# Altium PCB MB1364.PcbDoc
Units mm, origin at the board's own origin, x right, y up, seen from the top; angles counter-clockwise.
Board outline 70 x 133.34 mm, 6 copper layers (Top Layer, Signal Layer 1, Signal Layer 2, Signal Layer 3, Signal Layer 4, Bottom Layer), stack 1.57 mm thick; 29 components, 132 nets, 264 pads, 8 vias.
Unrouted connection lines stored in the file: 63.
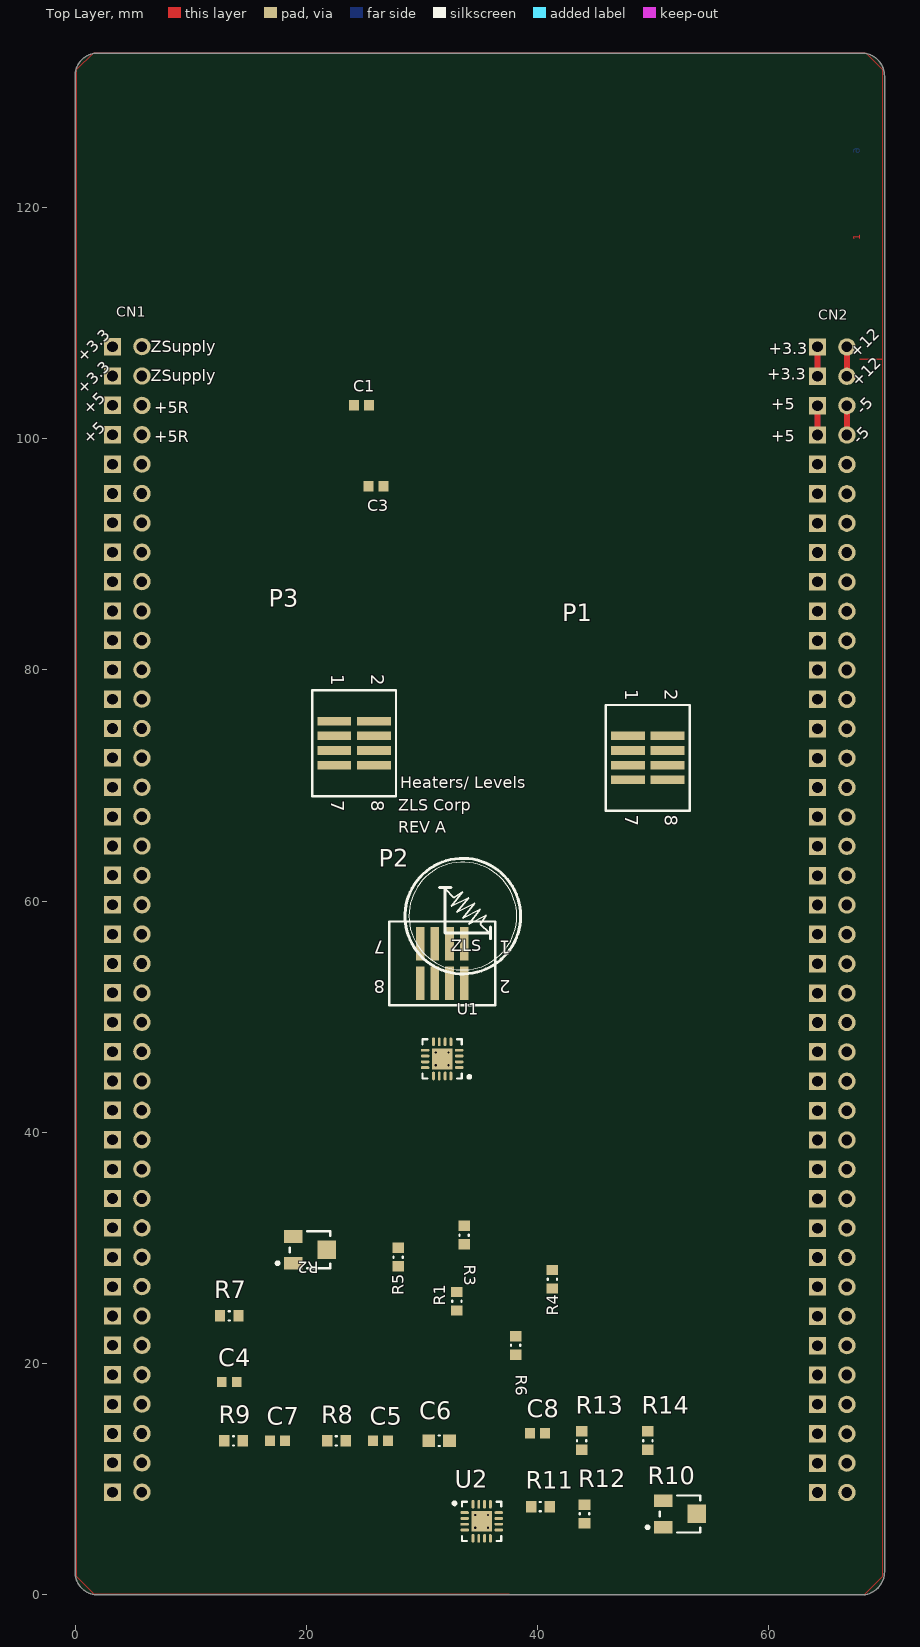
[diagram p0: Top Layer view]
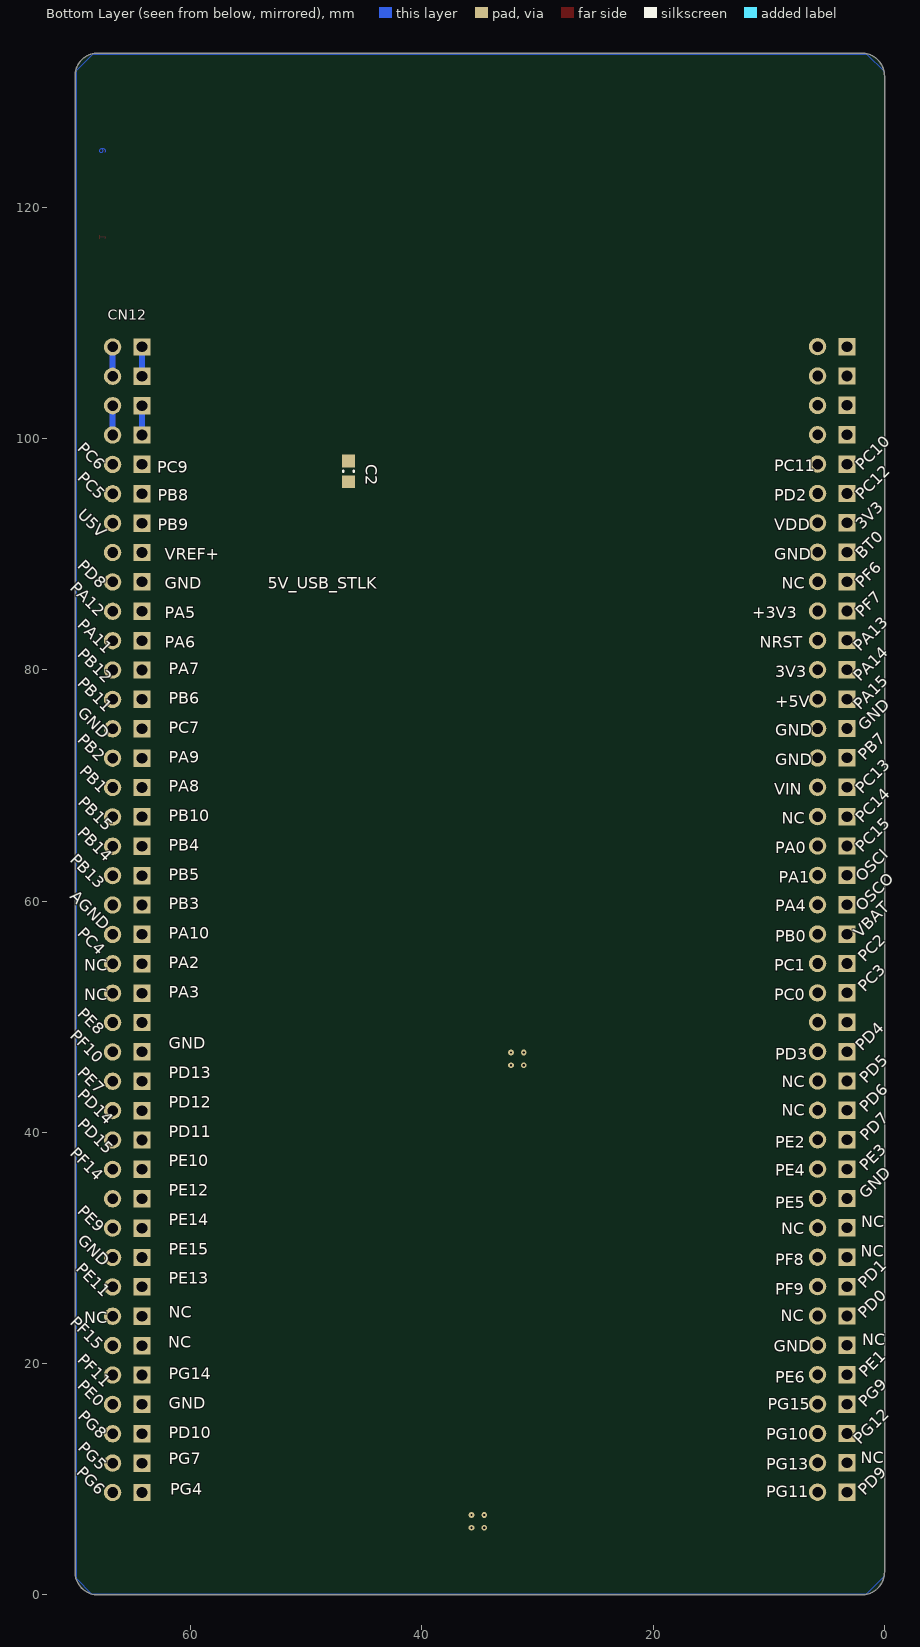
[diagram p1: Bottom Layer view, seen from below]
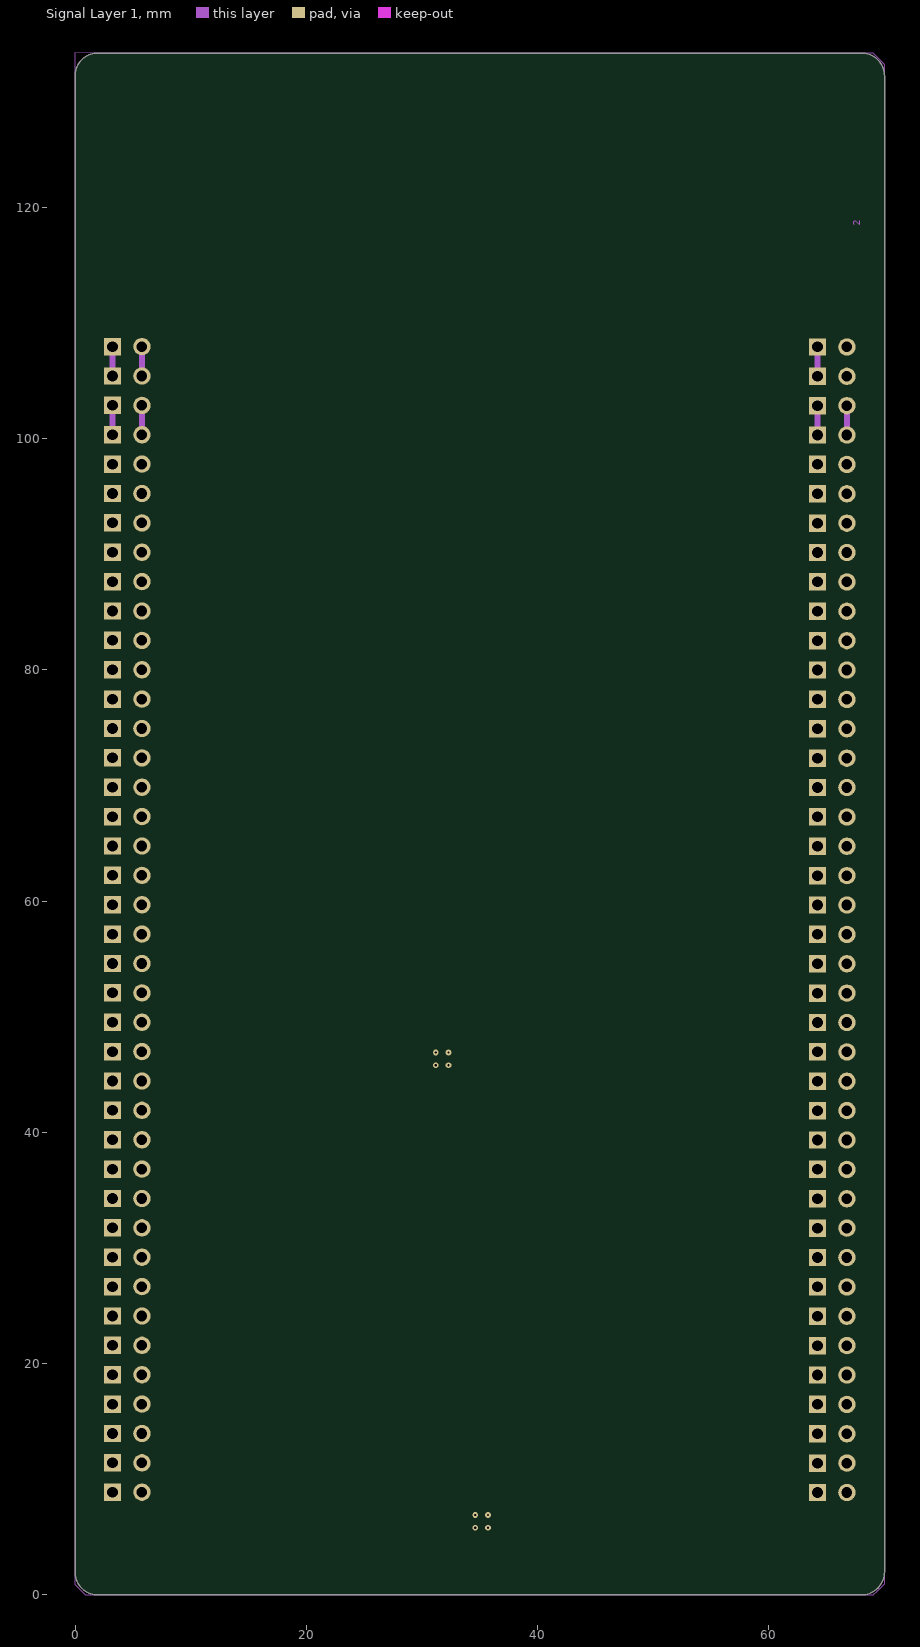
[diagram p2: Signal Layer 1]
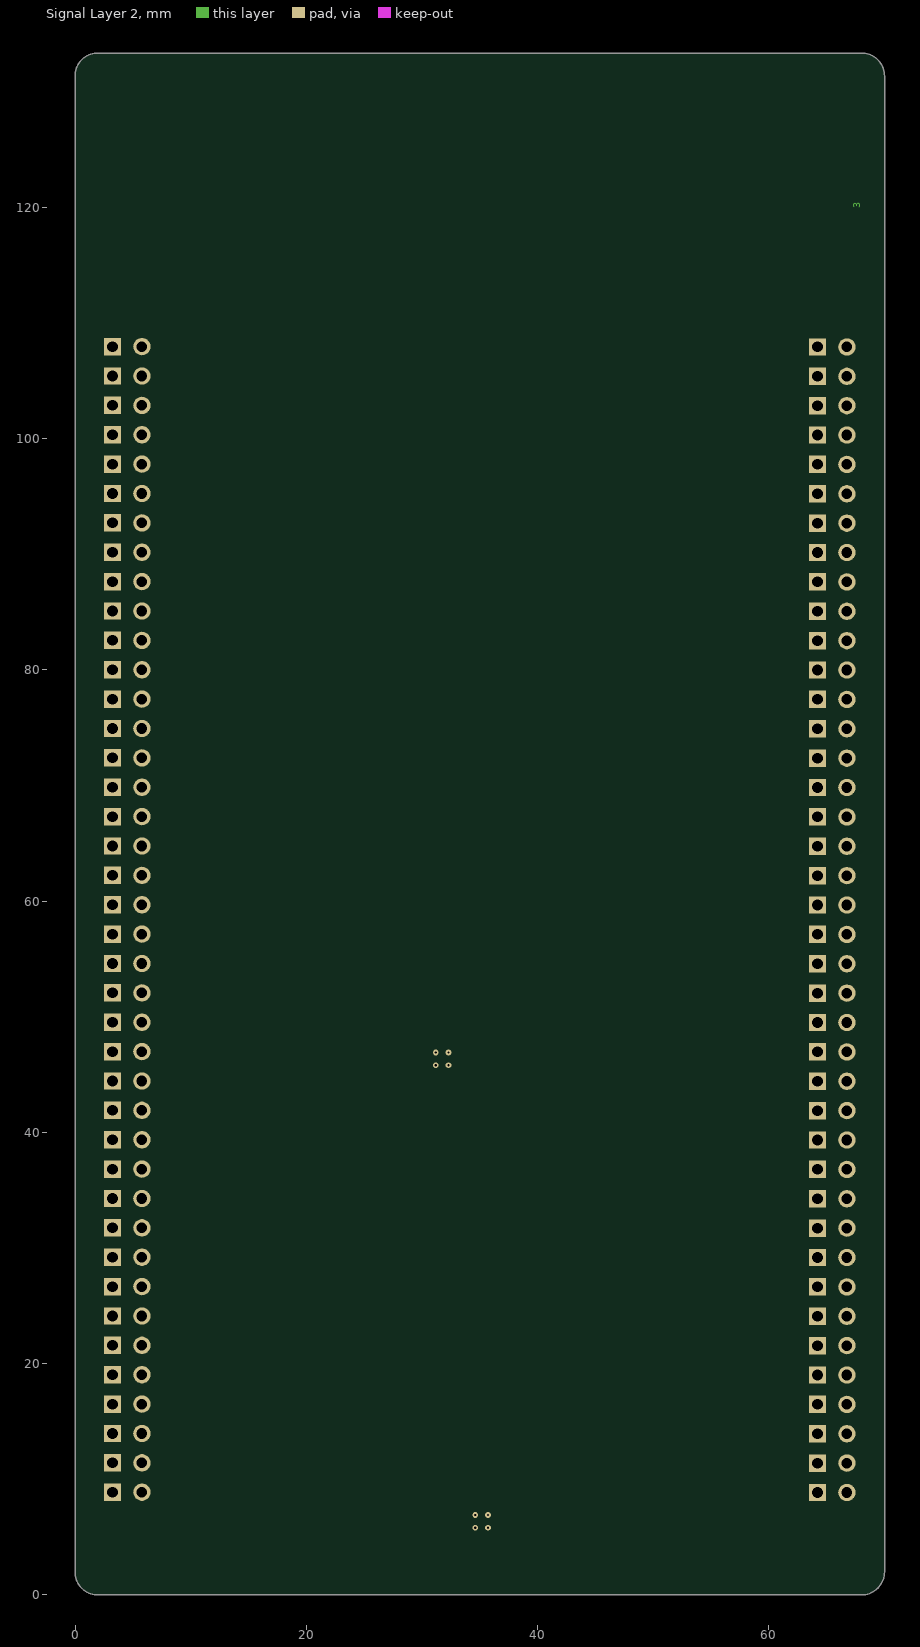
[diagram p3: Signal Layer 2]
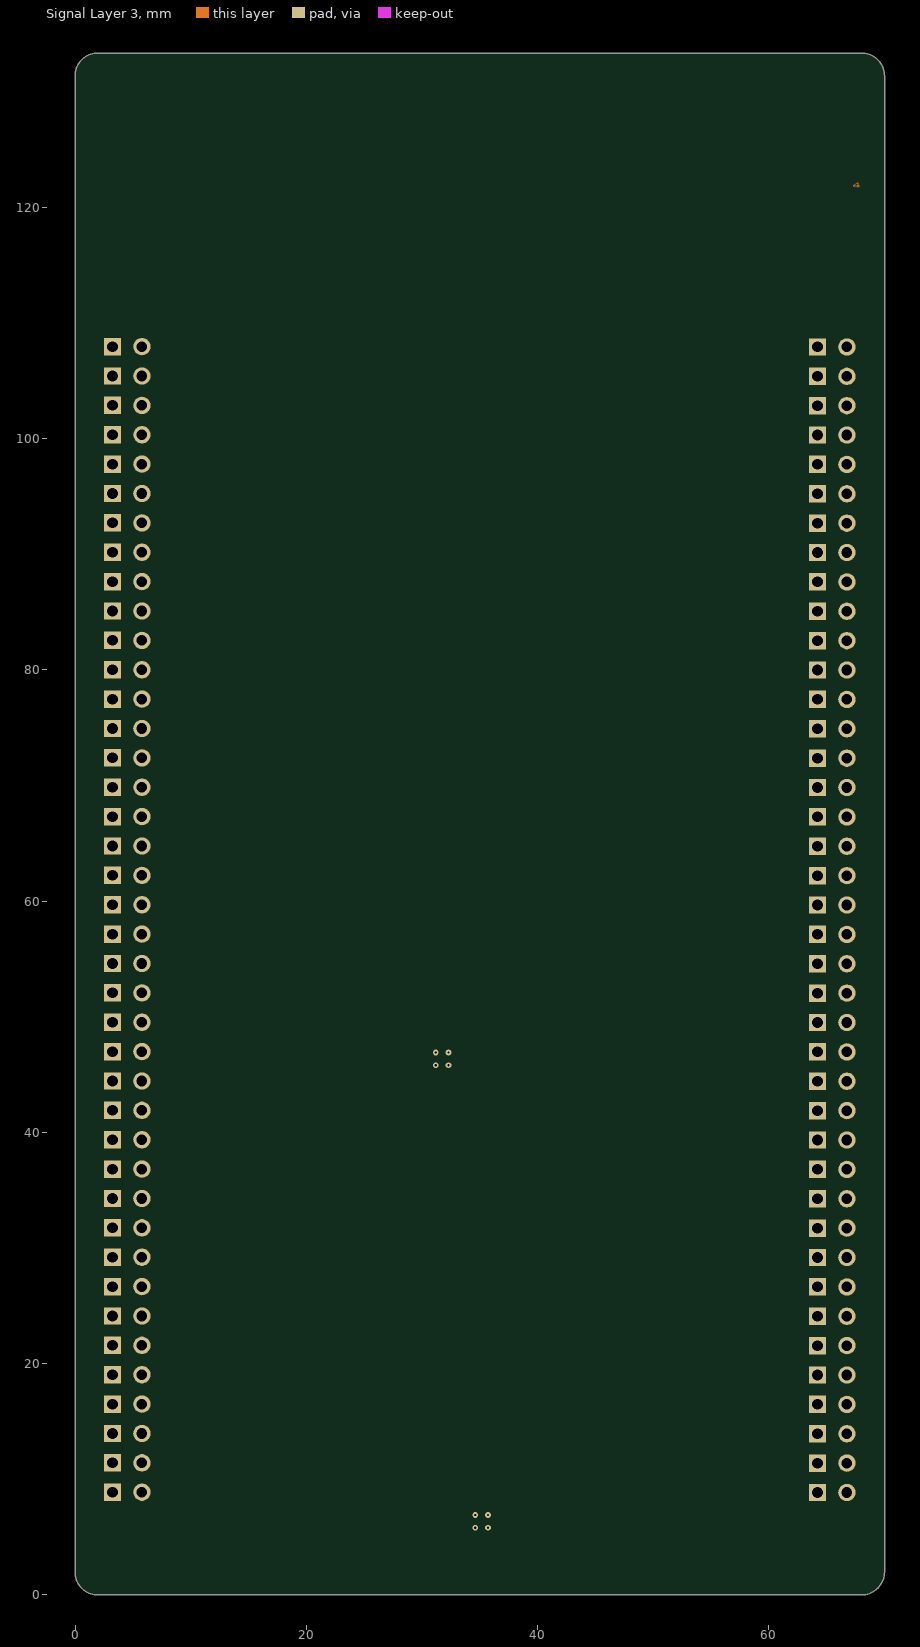
[diagram p4: Signal Layer 3]
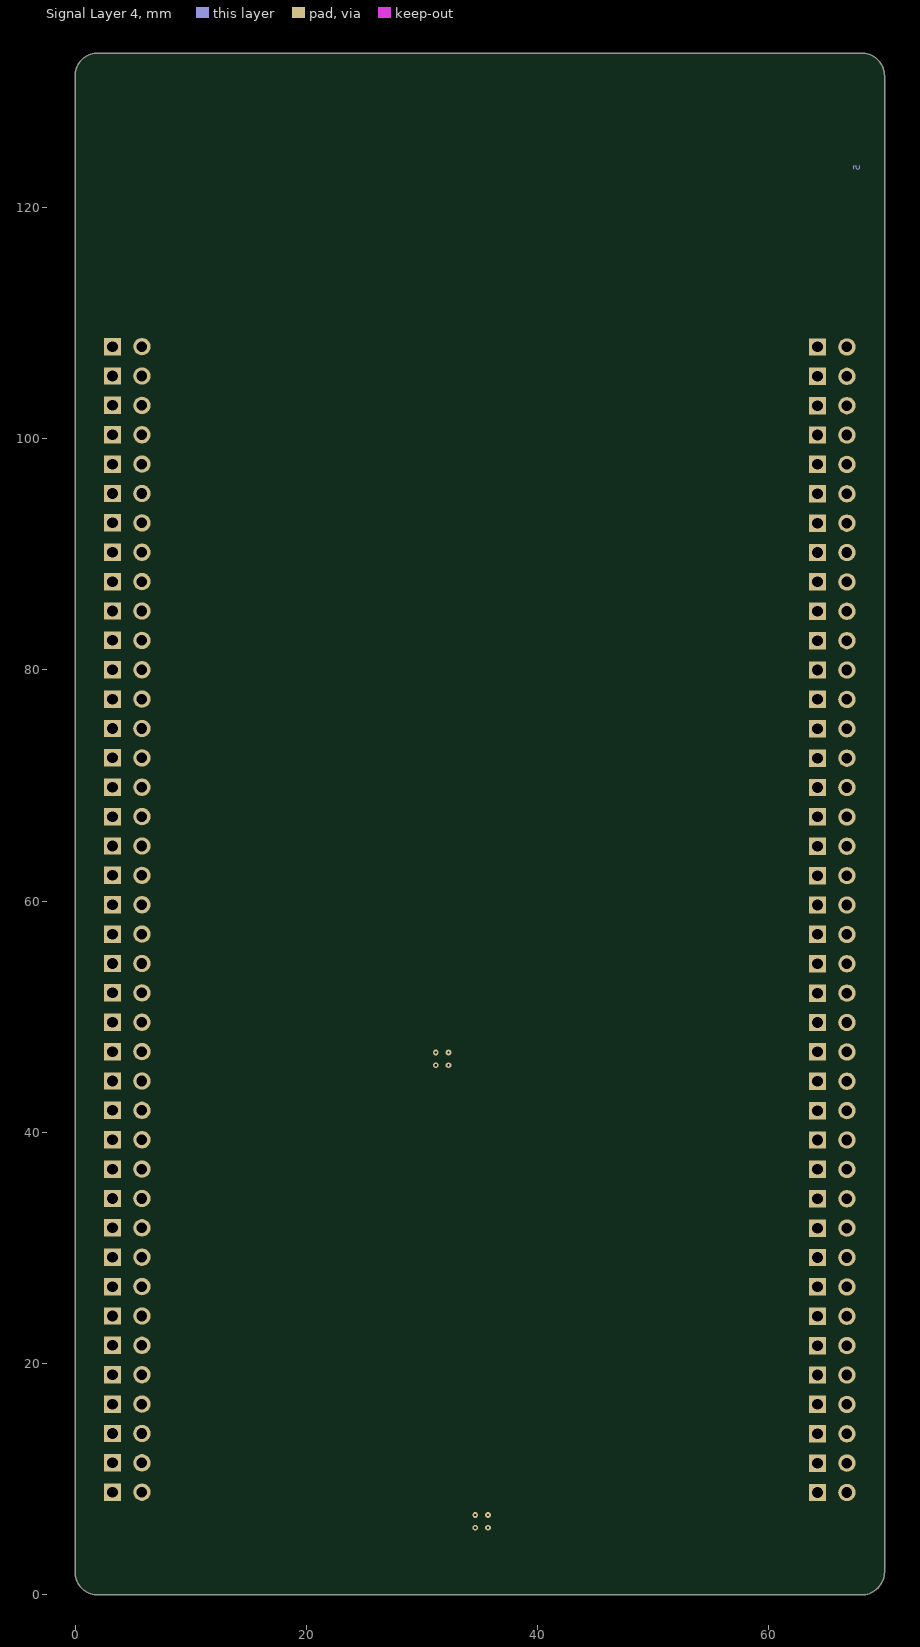
[diagram p5: Signal Layer 4]

## Layer stack, top to bottom
Top Solder: solder mask 0.015, Solder Resist, Dk 3.5
Top Layer: signal copper 0.042
Dielectric 1: prepreg 0.0991, FR-4, Dk 4.2
Signal Layer 1: signal copper 0.0348
Dielectric 2: core 0.1016, Dk 4.2
Signal Layer 2: signal copper 0.0348
Dielectric 3: prepreg 0.9457, Dk 4.2
Signal Layer 3: signal copper 0.0348
Dielectric 4: core 0.1016, Dk 4.2
Signal Layer 4: signal copper 0.0348
Dielectric 5: prepreg 0.0991, Dk 4.2
Bottom Layer: signal copper 0.042
Bottom Solder: solder mask 0.015, Solder Resist, Dk 3.5

## Board outline
0,2 ccw(c2,2) 2,0 37.369,0 51.369,0 68,0 ccw(c68,2) 70,2 70,131.34 ccw(c68,131.34) 68,133.34 2,133.34 ccw(c2,131.34) 0,131.34

## Design rules (kind name [scope] priority, off if disabled: settings)
BoardOutlineClearance [All] p1: gap=0.4 ignorepadtopadclearanceinfootprint=FALSE
Clearance Clearance_RMII_SINGLE_50R [InNetClass('NC_RMII_SINGLE_50R')] p1: gap=0.12 ignorepadtopadclearanceinfootprint=TRUE except(0.2: Arc-Hole Track-Hole SMDPad-SMDPad SMDPad-THPad SMDPad-Hole THPad-THPad THPad-Hole Via-Via Via-Hole Fill-Hole Poly-Hole Region-Hole Text-Hole; 0.3: Arc-Fill Arc-Poly Track-Track Track-Fill Track-Poly SMDPad-Fill SMDPad-Poly THPad-Fill THPad-Poly Via-Fill Via-Poly Fill-Fill Fill-Poly Poly-Poly)
Clearance Clearance_VCP_ISO300 [InNetClass('NC_VCP_ISO300')] p2: gap=0.12 ignorepadtopadclearanceinfootprint=TRUE except(0.2: Arc-Hole Track-Hole SMDPad-SMDPad SMDPad-THPad SMDPad-Hole THPad-THPad THPad-Hole Via-Via Via-Hole Fill-Hole Poly-Hole Region-Hole Text-Hole; 0.3: Arc-Fill Arc-Poly Track-Track Track-Fill Track-Poly SMDPad-Fill SMDPad-Poly THPad-Fill THPad-Poly Via-Fill Via-Poly Fill-Fill Fill-Poly Poly-Poly)
Clearance Clearance_USB_DIFF_90R [InNetClass('NC_USB_DIFF_90R')] p3: gap=0.12 ignorepadtopadclearanceinfootprint=TRUE except(0.2: Arc-Hole Track-Hole SMDPad-SMDPad SMDPad-THPad SMDPad-Hole THPad-THPad THPad-Hole Via-Via Via-Hole Fill-Hole Poly-Hole Region-Hole Text-Hole; 0.3: Arc-Fill Arc-Poly Track-Fill Track-Poly SMDPad-Fill SMDPad-Poly THPad-Fill THPad-Poly Via-Fill Via-Poly Fill-Fill Fill-Poly Poly-Poly)
Clearance Clearance_USB_DIFF_90R_OPTION [InNetClass('NC_USB_DIFF_90R_OPTION') vs OnLayer('Top Layer')] p4: gap=0.12 ignorepadtopadclearanceinfootprint=TRUE except(0.2: Arc-Hole Track-Hole SMDPad-SMDPad SMDPad-THPad SMDPad-Hole THPad-THPad THPad-Hole Via-Via Via-Hole Fill-Hole Poly-Hole Region-Hole Text-Hole; 0.226: Track-Track; 0.3: Arc-Fill Arc-Poly Track-Fill Track-Poly SMDPad-Fill SMDPad-Poly THPad-Fill THPad-Poly Via-Fill Via-Poly Fill-Fill Fill-Poly Poly-Poly)
Clearance Clearance_USB_DIFF_90R_OPTION_L3 [InNetClass('NC_USB_DIFF_90R_OPTION') vs OnLayer('Signal Layer 2')] p5: gap=0.12 ignorepadtopadclearanceinfootprint=TRUE except(0.17: Track-Track; 0.2: Arc-Hole Track-Hole SMDPad-SMDPad SMDPad-THPad SMDPad-Hole THPad-THPad THPad-Hole Via-Via Via-Hole Fill-Hole Poly-Hole Region-Hole Text-Hole; 0.3: Arc-Fill Arc-Poly Track-Fill Track-Poly SMDPad-Fill SMDPad-Poly THPad-Fill THPad-Poly Via-Fill Via-Poly Fill-Fill Fill-Poly Poly-Poly)
Clearance Clearance_RXTX_DIFF_100R [InNetClass('NC_RXTX_DIFF_100R')] p6: gap=0.12 ignorepadtopadclearanceinfootprint=TRUE except(0.2: Arc-Hole Track-Hole SMDPad-SMDPad SMDPad-THPad SMDPad-Hole THPad-THPad THPad-Hole Via-Via Via-Hole Fill-Hole Poly-Hole Region-Hole Text-Hole; 0.3: Arc-Fill Arc-Poly Track-Fill Track-Poly SMDPad-Fill SMDPad-Poly THPad-Fill THPad-Poly Via-Fill Via-Poly Fill-Fill Fill-Poly Poly-Poly)
Clearance Clearance_STLK_ISO200 [InNetClass('NC_STLK_W200-ISO200')] p7: gap=0.12 ignorepadtopadclearanceinfootprint=TRUE except(0.2: Arc-Poly Arc-Hole Track-Track Track-Poly Track-Hole SMDPad-SMDPad SMDPad-THPad SMDPad-Poly SMDPad-Hole THPad-THPad THPad-Poly THPad-Hole Via-Via Via-Poly Via-Hole Fill-Poly Fill-Hole Poly-Poly Poly-Hole Region-Hole Text-Hole; 0.3: Arc-Fill Track-Fill SMDPad-Fill THPad-Fill Via-Fill Fill-Fill)
Clearance [All] p8: gap=0.12 ignorepadtopadclearanceinfootprint=TRUE except(0.2: Arc-Hole Track-Hole SMDPad-SMDPad SMDPad-THPad SMDPad-Hole THPad-THPad THPad-Hole Via-Via Via-Hole Fill-Hole Poly-Hole Region-Hole Text-Hole; 0.3: Arc-Fill Track-Fill SMDPad-Fill THPad-Fill Via-Fill Fill-Fill)
ComponentClearance [All] p1: gap=0 collisioncheckmode=3 verticalgap=0 showdistances=FALSE
DiffPairsRouting DiffPairsRouting_USB_90R [InDifferentialPairClass('DPC_USB_DIFF_90R')] p1: maxlimit=0.252 minlimit=0.226 mostfreqgap=0.226 toplayer_mingap=0.226 toplayer_maxgap=0.226 toplayer_minwidth=0.155 toplayer_maxwidth=0.155 toplayer_prefwidth=0.155 midlayer1_mingap=0.226 midlayer1_maxgap=0.226 midlayer1_minwidth=0.155 midlayer1_maxwidth=0.155 midlayer1_prefwidth=0.155 midlayer2_mingap=0.252 midlayer2_prefgap=0.252 midlayer2_minwidth=0.13 midlayer2_maxwidth=0.13 midlayer2_prefwidth=0.13 midlayer3_maxgap=0.226 midlayer3_prefgap=0.226 midlayer3_minwidth=0.155 midlayer3_maxwidth=0.155 midlayer3_prefwidth=0.155 midlayer4_mingap=0.226 midlayer4_maxgap=0.226 midlayer4_minwidth=0.155 midlayer4_maxwidth=0.155 midlayer4_prefwidth=0.155 bottomlayer_mingap=0.226 bottomlayer_maxgap=0.226 bottomlayer_minwidth=0.155 bottomlayer_maxwidth=0.155 bottomlayer_prefwidth=0.155 maxuncoupledlength=12.7
DiffPairsRouting DiffPairsRouting_RXTX_100R [InDifferentialPairClass('DPC_RXTX_DIFF_100R')] p2: maxlimit=0.277 minlimit=0.252 mostfreqgap=0.277 toplayer_maxgap=0.252 toplayer_prefgap=0.252 toplayer_minwidth=0.11 toplayer_maxwidth=0.13 toplayer_prefwidth=0.13 midlayer1_maxgap=0.252 midlayer1_prefgap=0.252 midlayer1_minwidth=0.13 midlayer1_maxwidth=0.13 midlayer1_prefwidth=0.13 midlayer2_mingap=0.277 midlayer2_minwidth=0.104 midlayer2_maxwidth=0.104 midlayer2_prefwidth=0.104 midlayer3_maxgap=0.252 midlayer3_prefgap=0.252 midlayer3_minwidth=0.13 midlayer3_maxwidth=0.13 midlayer3_prefwidth=0.13 midlayer4_maxgap=0.252 midlayer4_prefgap=0.252 midlayer4_minwidth=0.13 midlayer4_maxwidth=0.13 midlayer4_prefwidth=0.13 bottomlayer_maxgap=0.252 bottomlayer_prefgap=0.252 bottomlayer_minwidth=0.11 bottomlayer_maxwidth=0.13 bottomlayer_prefwidth=0.13 maxuncoupledlength=12.7
FabricationTestPointUsage TestPointUsage [All] p1: valid=0 allowmultiple=FALSE
FabricationTestpoint Testpoint [(IsPad And (OnTopLayer Or OnBottomLayer))] p1: side=3 testpointundercomponent=TRUE minsize=1.016 maxsize=2.54 preferedsize=1.524 minholesize=0 maxholesize=1.016 preferedholesize=0.813 testpointgrid=0.025 allowsidetop=TRUE allowsidebottom=TRUE usegrid=TRUE gridtolerance=0
HoleSize [All] p1: absolutevalues=TRUE maxlimit=3.81 minlimit=0.025 maxpercent=80.000 minpercent=20.000
MinimumSolderMaskSliver [All] p1: minsoldermaskwidth=0
PolygonConnect PolygonConnect_10 [All vs IsNamedPolygon('USB_FS_VBUS_L01_P068')] p1: connectstyle=Direct reliefconductorwidth=0.254 reliefentries=4 polygonreliefangle="90 Angle" airgapwidth=0.254
PolygonConnect PolygonConnect_9 [All vs IsNamedPolygon('5V_L03_P060')] p2: connectstyle=Direct reliefconductorwidth=0.254 reliefentries=4 polygonreliefangle="90 Angle" airgapwidth=0.254
PolygonConnect PolygonConnect_8 [All vs IsNamedPolygon('5V_L01_P058')] p3: connectstyle=Direct reliefconductorwidth=0.254 reliefentries=4 polygonreliefangle="90 Angle" airgapwidth=0.254
PolygonConnect PolygonConnect_7 [All vs IsNamedPolygon('3V3_STLK_L04_P042')] p4: connectstyle=Direct reliefconductorwidth=0.254 reliefentries=4 polygonreliefangle="90 Angle" airgapwidth=0.254
PolygonConnect PolygonConnect_6 [All vs IsNamedPolygon('5V_USB_CHGR_L04_P040')] p5: connectstyle=Direct reliefconductorwidth=0.254 reliefentries=4 polygonreliefangle="90 Angle" airgapwidth=0.254
PolygonConnect PolygonConnect_5 [All vs IsNamedPolygon('5V_L01_P038')] p6: connectstyle=Direct reliefconductorwidth=0.254 reliefentries=4 polygonreliefangle="90 Angle" airgapwidth=0.254
PolygonConnect PolygonConnect_4 [All vs IsNamedPolygon('5V_L01_P038')] p7: thpad.connectstyle=Relief thpad.reliefconductorwidth=0.4 thpad.reliefentries=4 thpad.polygonreliefangle="90 Angle" thpad.airgapwidth=0.4 smdpad.connectstyle=Direct smdpad.reliefconductorwidth=0.254 smdpad.reliefentries=4 smdpad.polygonreliefangle="90 Angle" smdpad.airgapwidth=0.254 via.connectstyle=Direct via.reliefconductorwidth=0.254 via.reliefentries=4 via.polygonreliefangle="90 Angle" via.airgapwidth=0.254
PolygonConnect PolygonConnect_3 [All vs IsNamedPolygon('5V_VIN_L01_P028')] p8: connectstyle=Direct reliefconductorwidth=0.254 reliefentries=4 polygonreliefangle="90 Angle" airgapwidth=0.254
PolygonConnect PolygonConnect_2 [All vs IsNamedPolygon('3V3_L01_P026')] p9: connectstyle=Direct reliefconductorwidth=0.254 reliefentries=4 polygonreliefangle="90 Angle" airgapwidth=0.254
PolygonConnect PolygonConnect_1 [All vs IsNamedPolygon('GND_L01_P024')] p10: connectstyle=Direct reliefconductorwidth=0.254 reliefentries=4 polygonreliefangle="90 Angle" airgapwidth=0.254
PolygonConnect [All] p11: thpad.connectstyle=Relief thpad.reliefconductorwidth=0.3 thpad.reliefentries=4 thpad.polygonreliefangle="90 Angle" thpad.airgapwidth=0.3 smdpad.connectstyle=Relief smdpad.reliefconductorwidth=0.3 smdpad.reliefentries=4 smdpad.polygonreliefangle="90 Angle" smdpad.airgapwidth=0.3 via.connectstyle=Direct via.reliefconductorwidth=0.254 via.reliefentries=4 via.polygonreliefangle="90 Angle" via.airgapwidth=0.254
RoutingLayers RoutingLayers_USB_DIFF_90R [InDifferentialPairClass('DPC_USB_DIFF_90R')] p1: top layer_v5=TRUE mid layer 1_v5=TRUE mid layer 2_v5=TRUE mid layer 3_v5=TRUE mid layer 4_v5=TRUE bottom layer_v5=TRUE
RoutingLayers RoutingLayers_RXTX_DIFF_100R [InDifferentialPairClass('DPC_RXTX_DIFF_100R')] p2: top layer_v5=TRUE mid layer 1_v5=TRUE mid layer 2_v5=TRUE mid layer 3_v5=TRUE mid layer 4_v5=TRUE bottom layer_v5=TRUE
RoutingLayers RoutingLayers_RMII_SINGLE_50R [InNetClass('NC_RMII_SINGLE_50R')] p3: top layer_v5=TRUE mid layer 1_v5=TRUE mid layer 2_v5=TRUE mid layer 3_v5=TRUE mid layer 4_v5=TRUE bottom layer_v5=TRUE
RoutingVias RoutingVias_Default [All] p1: holewidth=0.2 width=0.45 viastyle="Through Hole" minholewidth=0.2 minwidth=0.45 maxholewidth=0.2 maxwidth=0.45
SilkToSilkClearance [All] p1: silktosilkclearance=0.102
SilkToSolderMaskClearance SilkscreenOverComponentPads [IsPad] p1: minsilkscreentomaskgap=0.102 clearancetoexposedcopper=TRUE
SolderMaskExpansion [All] p1: expansion=0.102
Width Width_RMII_SINGLE_50R [InNetClass('NC_RMII_SINGLE_50R')] p1: maxlimit=0.127 minlimit=0.102 preferedwidth=0.127 toplayer_minwidth=0.127 midlayer1_minwidth=0.127 midlayer2_maxwidth=0.102 midlayer2_prefwidth=0.102 midlayer3_minwidth=0.127 midlayer4_minwidth=0.127 bottomlayer_minwidth=0.127 minimp=50.000000 maximp=50.000000 favimp=50.000000
Width Width_POWER_300u [InNetClass('NC_POWER_300u')] p2: maxlimit=10 minlimit=0.12 preferedwidth=0.3 minimp=50.000000 maximp=50.000000 favimp=50.000000
Width Width_GROUND [InNetClass('NC_GROUND')] p3: maxlimit=10 minlimit=0.12 preferedwidth=0.3 minimp=50.000000 maximp=50.000000 favimp=50.000000
Width Width_POWER_500u [InNetClass('NC_POWER_500u')] p4: maxlimit=10 minlimit=0.12 preferedwidth=0.5 minimp=50.000000 maximp=50.000000 favimp=50.000000
Width Width_POWER_SMPS [InNetClass('NC_POWER_SMPS')] p5: maxlimit=10 minlimit=0.12 preferedwidth=0.5 minimp=50.000000 maximp=50.000000 favimp=50.000000
Width Width_STLK_W200 [InNetClass('NC_STLK_W200-ISO200')] p6: maxlimit=10 minlimit=0.2 preferedwidth=0.2 minimp=50.000000 maximp=50.000000 favimp=50.000000
Width Width_USB_OPTION [InNetClass('NC_USB_DIFF_90R_OPTION')] p7: maxlimit=0.155 minlimit=0.13 preferedwidth=0.155 toplayer_minwidth=0.155 midlayer1_minwidth=0.155 midlayer2_maxwidth=0.13 midlayer2_prefwidth=0.13 midlayer3_minwidth=0.155 midlayer4_minwidth=0.155 bottomlayer_minwidth=0.155 minimp=50.000000 maximp=50.000000 favimp=50.000000
Width [All] p8: maxlimit=10 minlimit=0.12 preferedwidth=0.12 minimp=50.000000 maximp=50.000000 favimp=50.000000
Width Width_RD_N [InNet('RD_N')] p9: maxlimit=10 minlimit=0.11 preferedwidth=0.12 toplayer_maxwidth=0.11 toplayer_prefwidth=0.11 midlayer1_minwidth=0.12 midlayer2_minwidth=0.12 midlayer3_minwidth=0.12 midlayer4_minwidth=0.12 bottomlayer_maxwidth=0.11 bottomlayer_prefwidth=0.11 minimp=50.000000 maximp=50.000000 favimp=50.000000
Width Width_TD_P [InNet('TD_P')] p10: maxlimit=10 minlimit=0.11 preferedwidth=0.12 toplayer_maxwidth=0.11 toplayer_prefwidth=0.11 midlayer1_minwidth=0.12 midlayer2_minwidth=0.12 midlayer3_minwidth=0.12 midlayer4_minwidth=0.12 bottomlayer_maxwidth=0.11 bottomlayer_prefwidth=0.11 minimp=50.000000 maximp=50.000000 favimp=50.000000
21 further rules are at their usual default settings.

## Classes and differential pairs
component class Motors: C1 C2 C3 C4 C5 C6 C7 C8 R1 R2 R3 R4 R5 R6 R7 R8 R9 R10 R11 R12 R13 R14 U1 U2
component class Connectors: CN1 CN2 HW1 HW2 P1 P2 P3

## Components (designator, comment, footprint, x,y, rotation, side; value= is the part's Value field where it differs from the comment)
C1 "0.1uF" CAPC1608X94X35LL15T15 24.765,102.87 r0 top
C2 "4.7uF" CAPC0603(1608)55_M 46.355,97.155 r270 bottom
C3 "22nF" CAPC1608X94X35LL15T15 26.035,95.885 r0 top
C4 "0.1uF" CAPC1608X94X35LL15T15 13.335,18.415 r0 top
C5 "0.1uF" CAPC1608X94X35LL15T15 26.405,13.335 r0 top
C6 "4.7uF" CAPC0603(1608)55_M 31.485,13.335 r0 top
C7 "0.1uF" CAPC1608X94X35LL15T15 17.515,13.335 r0 top
C8 "22nF" CAPC1608X94X35LL15T15 40.005,13.99 r0 top
CN1 "SSW-140-23-G-D" SSW-140-23-G-D 4.516,58.419 r270 top locked
CN2 "SSW-140-23-G-D" SSW-140-23-G-D 65.476,58.394 r270 top locked
P1 "SAMTEC-TFM-104-02-X-DJ" SAMTEC-TFM-104-02-X-D 49.53,72.39 r270 top
P2 "SAMTEC-TFM-104-02-X-DJ" SAMTEC-TFM-104-02-X-D 31.75,54.61 r180 top
P3 "SAMTEC-TFM-104-02-X-DJ" SAMTEC-TFM-104-02-X-D 24.13,73.66 r270 top
R1 "0.1" RESC0603(1608)_N 33.02,25.4 r90 top value="1020.00 Ohm"
R2 "3313J-1-503E" BOUR-3313J-1_V 20.32,29.845 r0 top
R3 "1k" RESC0603(1608)_N 33.655,31.115 r270 top value="1020.00 Ohm"
R4 "10k" RESC0603(1608)_N 41.275,27.305 r90 top value="1020.00 Ohm"
R5 ".2" RESC0603(1608)_N 27.94,29.21 r90 top value="1020.00 Ohm"
R6 ".2" RESC0603(1608)_N 38.1,21.59 r270 top value="1020.00 Ohm"
R7 "0.1" RESC0603(1608)_N 13.335,24.13 r0 top value="1020.00 Ohm"
R8 "0.1" RESC0603(1608)_N 22.595,13.335 r0 top value="1020.00 Ohm"
R9 "0.1" RESC0603(1608)_N 13.705,13.335 r0 top value="1020.00 Ohm"
R10 "3313J-1-503E" BOUR-3313J-1_V 52.312,7.005 r0 top
R11 "1k" RESC0603(1608)_N 40.247,7.64 r0 top value="1020.00 Ohm"
R12 "10k" RESC0603(1608)_N 44.057,7.005 r90 top value="1020.00 Ohm"
R13 ".2" RESC0603(1608)_N 43.815,13.355 r90 top value="1020.00 Ohm"
R14 ".2" RESC0603(1608)_N 49.53,13.355 r90 top value="1020.00 Ohm"
U1 "STSPIN220" STSPIN220-QFN127P600-8N 31.75,46.355 r180 top
U2 "STSPIN220" STSPIN220-QFN127P600-8N 35.167,6.37 r0 top

## Footprints (in the part's own frame and the unit in brackets; to place one, negate y for a bottom-side part, rotate by r counter-clockwise, add the part's x,y. Pads: shape width x height; smd on the part's side, far side on the other; paste and mask are expansions set on the pad)
BOUR-3313J-1_V [mm] "SMD, 3-Leads, Body 3.5x3.2mm, Pitch 1.15mm"
  rect 1.6x1.1 smd paste+0: 1(-1.45,-1.15) 3(-1.45,1.15)
  rect 1.6x1.6 smd paste+0: 2(1.45,0)
  silkscreen extent -2.92,-1.6 1.75,1.6, body extent -1.75,-1.65 1.75,1.65, height 2.11
CAPC0603(1608)55_M [mm] "Chip Capacitor, Body 1.6x0.8mm, Height 0.55mm, IPC Low Density"
  rect 1.1x1.1 smd: 1(-0.9,0) 2(0.9,0)
  silkscreen extent -0.05,-0.45 0.05,0.45, body extent -0.87,-0.47 0.88,0.48, height 0.55
CAPC1608X94X35LL15T15 [mm]
  rect 0.85x0.9 smd: 1(-0.65,0) 2(0.65,0)
  body extent -0.88,-0.48 0.87,0.48, height 0.94
RESC0603(1608)_N [mm] "Chip Resistor, Body 1.6x0.8mm, IPC Medium Density"
  rect 0.9x1 smd: 1(-0.8,0) 2(0.8,0)
  silkscreen extent -0.05,-0.4 0.05,0.4, body extent -0.85,-0.47 0.85,0.47, height 0.6
SAMTEC-TFM-104-02-X-D [mm]
  rect 0.74x2.92 smd: 1(-1.905,-1.714) 2(-1.905,1.714) 3(-0.635,-1.714) 4(-0.635,1.714) 5(0.635,-1.714) 6(0.635,1.714) 7(1.905,-1.714) 8(1.905,1.714)
  silkscreen extent -4.58,-3.63 4.58,3.63
SSW-140-23-G-D [mm]
  rect 1.5x1.5 hole 0.92: 1(-49.53,-1.27) 3(-46.99,-1.27) 5(-44.45,-1.27) 7(-41.91,-1.27) 9(-39.37,-1.27) 11(-36.83,-1.27) 13(-34.29,-1.27) 15(-31.75,-1.27) 17(-29.21,-1.27) 19(-26.67,-1.27) 21(-24.13,-1.27) 23(-21.59,-1.27) 25(-19.05,-1.27) 27(-16.51,-1.27) 29(-13.97,-1.27) 31(-11.43,-1.27) 33(-8.89,-1.27) 35(-6.35,-1.27) 37(-3.81,-1.27) 39(-1.27,-1.27) 41(1.27,-1.27) 43(3.81,-1.27) 45(6.35,-1.27) 47(8.89,-1.27) 49(11.43,-1.27) 51(13.97,-1.27) 53(16.51,-1.27) 55(19.05,-1.27) 57(21.59,-1.27) 59(24.13,-1.27) 61(26.67,-1.27) 63(29.21,-1.27) 65(31.75,-1.27) 67(34.29,-1.27) 69(36.83,-1.27) 71(39.37,-1.27) 73(41.91,-1.27) 75(44.45,-1.27) 77(46.99,-1.27) 79(49.53,-1.27)
  round 1.5 hole 0.92: 2(-49.53,1.27) 4(-46.99,1.27) 6(-44.45,1.27) 8(-41.91,1.27) 10(-39.37,1.27) 12(-36.83,1.27) 14(-34.29,1.27) 16(-31.75,1.27) 18(-29.21,1.27) 20(-26.67,1.27) 22(-24.13,1.27) 24(-21.59,1.27) 26(-19.05,1.27) 28(-16.51,1.27) 30(-13.97,1.27) 32(-11.43,1.27) 34(-8.89,1.27) 36(-6.35,1.27) 38(-3.81,1.27) 40(-1.27,1.27) 42(1.27,1.27) 44(3.81,1.27) 46(6.35,1.27) 48(8.89,1.27) 50(11.43,1.27) 52(13.97,1.27) 54(16.51,1.27) 56(19.05,1.27) 58(21.59,1.27) 60(24.13,1.27) 62(26.67,1.27) 64(29.21,1.27) 66(31.75,1.27) 68(34.29,1.27) 70(36.83,1.27) 72(39.37,1.27) 74(41.91,1.27) 76(44.45,1.27) 78(46.99,1.27) 80(49.53,1.27)
  body extent -51.05,-2.48 51.05,2.48, height 8.51
STSPIN220-QFN127P600-8N [mm]
  oval 0.75x0.25 smd: 1(-1.475,0.75) 2(-1.475,0.25) 3(-1.475,-0.25) 4(-1.475,-0.75) 9(1.475,-0.75) 10(1.475,-0.25) 11(1.475,0.25) 12(1.475,0.75)
  oval 0.25x0.75 smd: 5(-0.75,-1.475) 6(-0.25,-1.475) 7(0.25,-1.475) 8(0.75,-1.475) 13(0.75,1.475) 14(0.25,1.475) 15(-0.25,1.475) 16(-0.75,1.475)
  rect 1.8x1.8 smd: 17(0,0)
  silkscreen extent -2.48,-1.7 1.7,1.7, body extent -1.6,-1.6 1.6,1.6, height 1

## Part data
C1 C3 C4 C5 C7 C8: library part CMP-1661-00001-2, "CAP .1UF 16V CERAMIC X7R 0603", Capacitance=1uF, Case/Package=0603, Case Code (Metric)=1608, Dielectric=X7R, Manufacturer=Yageo, Manufacturer Part Number=CC0603KRX7R7BB105, Max Operating Temperature=125°C, Min Operating Temperature=-55°C, Package Quantity=1, Supplier Part Number 1=311-1446-6-ND, Tolerance=10%, Voltage=16V, Case Code (Imperial)=0603, ComponentLink1Description=Datasheet, ComponentLink1URL=http://datasheets.avx.com/X7RDielectric.pdf, ComponentLink2Description=http://www.yageo.com/documents/recent/UPY-GPHC_X7R_6.3V-to-50V_18.pdf, ComponentLink2URL=http://www.yageo.com/documents/recent/UPY-GPHC_X7R_6.3V-to-50V_18.pdf, ComponentLink3Description=http://www.yageo.com/documents/recent/UPY-GPHC_X7R_6.3V-to-50V_8.pdf, ComponentLink3URL=http://www.yageo.com/documents/recent/UPY-GPHC_X7R_6.3V-to-50V_8.pdf, ComponentLink4Description=http://www.farnell.com/datasheets/1734573.pdf, ComponentLink4URL=http://www.farnell.com/datasheets/1734573.pdf, ComponentLink5Description=http://www.farnell.com/datasheets/1489800.pdf, ComponentLink5URL=http://www.farnell.com/datasheets/1489800.pdf, Composition=Ceramic, Depth=0.8mm, Dissipation Factor=5%, Halogen Free="Halogen Free", Height=0.8mm, Lead Free="Lead Free", Length=1.6mm, Mount="Surface Mount", Number of Pins=2, Packaging="Tape and Reel", Pricing 1="1=0.21, 10=0.143, 100=0.0727, 500=0.04974, 1000=0.044 (USD)", Radiation Hardening=No, REACH SVHC=Unknown, Stock 1=5506121, Supplier 1=Digi-Key, Termination=SMD/SMT, Thickness=0.035inch, Voltage Rating=16V, Voltage Rating (DC)=16V, Width=0.031inch
C2 C6: library part CMP-1035-02779-1, "CAP 4.7uF 6.3V ±10% 0603 (1608 Metric) Thickness 0.55mm SMD", Case-EIA=0603, Case-Metric=1608, Dielectric=X5R, Dielectric Material=Ceramic, Manufacturer=KEMET, Manufacturer Part Number=C0603C475K9PACTU, Max Operating Temperature=85°C, Min Operating Temperature=-55°C, Package Quantity=1, Rated Voltage="6.3 V", Supplier Part Number 1=399-3482-6-ND, Tolerance=±10%, Voltage=6.3V, Capacitance=4.7uF, Case/Package=0603, Case Code (Imperial)=0603, Case Code (Metric)=1608, ComponentLink1Description=https://api.kemet.com/component-edge/download/datasheet/C0603C475K9PACTU.pdf, ComponentLink1URL=https://api.kemet.com/component-edge/download/datasheet/C0603C475K9PACTU.pdf, ComponentLink2Description=http://www.farnell.com/datasheets/1732700.pdf, ComponentLink2URL=http://www.farnell.com/datasheets/1732700.pdf, ComponentLink3Description=http://www.farnell.com/datasheets/1789732.pdf, ComponentLink3URL=http://www.farnell.com/datasheets/1789732.pdf, ComponentLink4Description=http://www.farnell.com/datasheets/40889.pdf, ComponentLink4URL=http://www.farnell.com/datasheets/40889.pdf, Contact Plating=Matte,Tin, Depth=0.8mm, Dissipation Factor=5%, Height=0.8mm, Lead Free="Lead Free", Lead Pitch=0.7mm, Length=1.6mm, Max Thickness="0.55 mm", Mount="PCB,Surface Mount", Number of Pins=2, Packaging="Tape and Reel", Pricing 1="1=0.21, 10=0.15, 100=0.0706, 500=0.04952, 1000=0.041 (USD)", Radiation Hardening=No, REACH SVHC="No SVHC", Stock 1=1765509, Supplier 1=Digi-Key, Technology=SMT, Termination=SMD/SMT, Thickness=0.035inch, Voltage Rating=6.3V, Voltage Rating (DC)=6.3V, Width=0.031inch
CN1 CN2: "80 Position Receptacle Connector Through Hole", Manufacturer=Samtec, ComponentLink1Description=http://www.samtec.com/documents/webfiles/pdf/SSQ_TH.PDF?src-supplier=Avnet, ComponentLink1URL=http://www.samtec.com/documents/webfiles/pdf/SSQ_TH.PDF?src-supplier=Avnet, Contact Plating=Gold, Gender=Female, Manufacturer Part Number=SSW-140-23-G-D, Mount="Through Hole", Number of Contacts=80, Number of Rows=2, Packaging=Bulk, Pitch=2.54mm, Pricing 1="1=13.99000, 10=13.29000, 25=12.59000, 50=12.09000, 100=11.29000 (USD)", Radiation Hardening=No, RoHS=Yes, Stock 1=0, Supplier 1=Avnet, Supplier Part Number 1=SSW-140-23-G-D, Termination=Solder
R1 R3 R4 R5 R6 R7 R8 R9 R11 R12 R13 R14: library part CMP-1012-00511-1, "0R12 0.1W 1% 0603 (1608 Metric)  SMD", Case-EIA=0603, Case-Metric=1608, Manufacturer=Vishay, Manufacturer Part Number=CRCW060310K0FKEA, Max Operating Temperature=155°C, Max Power Dissipation=100mW, Min Operating Temperature=-55°C, Package Quantity=10, Power="0.1 W", Resistance=10kR, Supplier Part Number 1=311-0.0GRDKR-ND, Temperature Coefficient=100ppm/°C, Tolerance="1 %", Voltage Rating=75V, Case/Package=0603, Case Code (Imperial)=0603, Case Code (Metric)=1608, ComponentLink1Description=http://www.vishay.com/docs/20008/dcrcw.pdf, ComponentLink1URL=http://www.vishay.com/docs/20008/dcrcw.pdf, ComponentLink2Description=https://www.verical.com/server-webapp/html/getDatasheet?partID=86831, ComponentLink2URL=https://www.verical.com/server-webapp/html/getDatasheet?partID=86831, ComponentLink3Description=http://www.farnell.com/datasheets/2310790.pdf, ComponentLink3URL=http://www.farnell.com/datasheets/2310790.pdf, ComponentLink4Description=http://www.vishay.com/docs/20035/dcrcwe3.pdf, ComponentLink4URL=http://www.vishay.com/docs/20035/dcrcwe3.pdf, ComponentLink5Description=http://www.farnell.com/datasheets/2111203.pdf, ComponentLink5URL=http://www.farnell.com/datasheets/2111203.pdf, ComponentLink6Description=http://uk.rs-online.com/webdocs/0d98/0900766b80d98afc.pdf, ComponentLink6URL=http://uk.rs-online.com/webdocs/0d98/0900766b80d98afc.pdf, Composition="Thick Film", Contact Plating=Lead,Tin, Depth=0.85mm, Features="Automotive AEC-Q200", Height=0.45mm, Lead Free="Lead Free", Length=1.55mm, Military Standard=Not, Number of Pins=2, Number of Terminations=2, Packaging="Tape and Reel", Power Rating=100mW, Pricing 1="1=0.1, 10=0.021, 25=0.0152, 50=0.0114, 100=0.0084, 250=0.00644, 500=0.00514, 1000=0.00379 (USD)", Radiation Hardening=No, REACH SVHC=Unknown, Stock 1=49641653, Supplier 1=Digi-Key, Technology=SMT, Termination=SMD/SMT, Voltage Rating (DC)=75V, Weight=7.1E-05oz, Width=0.033inch
R2 R10: library part CMP-2000-05588-1, "3 mm Trimpot(R) Trimming Potentiometer, 50 KOhm, +/- 20%, 0.125 W, -55 to 125 degC, 3-Pin SMD, RoHS, Tape and Reel", Manufacturer=Bourns, Package Description="3-Pin Surface Mount Device, Body 3.5 x 3.2 mm, Pitch 1.15 mm", Package Reference=3313J-1, Power Rating=125mW, Resistance Tolerance=±20%, Temperature Coefficient=±150ppm/°C, Track Resistance=50kohm, Datasheet URL=http://www.bourns.com/docs/Product-Datasheets/3313.pdf, Datasheet Version=05/2016, Manufacturer URL=http://www.bourns.com/, Mounting Technology=SurfaceMount, No. of Turns=1, Potentiometer Mounting=SMD, SVHC=NoSVHC(19-Dec-2012)

## Via types
v1: diameter 0.5, hole 0.2, Top Layer to Bottom Layer, 8 vias

## Nets (pads, with @x,y where several pads share a name; then routed paths per layer and width w, separated by ;. In a path a pad name is that pad's centre, name@x,y a point inside that pad or via, vN(x,y) a via of type N, cw(c..) or ccw(c..) an arc to the next point about the centre after c; other vN are vias at no path point)
3V3: CN1.24
3V3_VDD: CN1.13
5V_USB_STLK: CN2.16
+3.3: CN1.1 CN1.3 CN2.1 CN2.3 P1.1 P1.3 R1.2 R9.2 | length 10.2
  Top Layer w0.5: CN2.3 CN2.1
  Signal Layer 1 w0.5: CN1.3 CN1.1 ; CN2.3 CN2.1
  Bottom Layer w0.5: CN2.3 CN2.1
+5: C1.1 C2.2 C5.1 C6.2 CN1.5 CN1.7 CN2.5 CN2.7 U1.6 U2.6 | length 10.2
  Top Layer w0.5: CN2.7 CN2.5
  Signal Layer 1 w0.5: CN1.7 CN1.5 ; CN2.7 CN2.5
  Bottom Layer w0.5: CN2.7 CN2.5
+5R: CN1.6 CN1.8 | length 2.5
  Signal Layer 1 w0.5: CN1.8 CN1.6
+12: CN2.2 CN2.4 | length 5.1
  Top Layer w0.5: CN2.4 CN2.2
  Bottom Layer w0.5: CN2.4 CN2.2
-5: CN2.6 CN2.8 | length 8
  Top Layer w0.5: CN2.8 CN2.6
  Signal Layer 1 w0.5: CN2.8 CN2.6
  Signal Layer 3 w0.12: CN2.6 CN2.6@66.746,103.256
  Bottom Layer w0.5: CN2.8 CN2.6
AGND: CN2.40
ARRESTMENT_OUT1+: P3.1 P3.2 U2.3
ARRESTMENT_OUT1-: P3.3 P3.4 U2.5
ARRESTMENT_OUT2+: P3.5 P3.6 U2.10
ARRESTMENT_OUT2-: P3.7 P3.8 U2.8
BOOT0: CN1.15
GND: C1.2 C2.1 C3.2 C4.1 C5.2 C6.1 C7.1 C8.2 CN1.16 CN1.27 CN1.28 CN1.30 CN1.59 CN1.70 CN2.17 CN2.28 CN2.49 CN2.64 CN2.73 P1.5 R2.1 R4.1 R5.1 R6.1 R10.1 R12.1 R13.1 R14.1 U1.7 U1.17 U2.7 U2.15 U2.16 U2.17
  other v1: 34.617,5.82 35.717,5.82 34.617,6.92 35.717,6.92 31.2,45.805 32.3,45.805 31.2,46.905 32.3,46.905
IOREF: CN1.20
NetC3_1: C3.1 R3.1
NetC8_1: C8.1 R11.1
NetR1_1: R1.1 R2.3
NetR2_2: R2.2 U1.11
NetR3_2: R3.2 R4.2 U1.12
NetR5_2: R5.2 U1.9
NetR6_2: R6.2 U1.4
NetR9_1: R9.1 R10.3
NetR10_2: R10.2 U2.11
NetR11_2: R11.2 R12.2 U2.12
NetR13_2: R13.2 U2.9
NetR14_2: R14.2 U2.4
NRST: CN1.22
PA0: CN1.36
PA1: CN1.38
PA2: CN2.43
PA7: CN2.23
PA8: CN2.31
PA9: CN2.29
PA10: CN2.41
PA11: CN2.22
PA12: CN2.20
PA13: CN1.21
PA14: CN1.23
PA15: CN1.25 P1.7
PB0: CN1.42
PB2: CN2.30 P1.2
PB3: CN2.39
PB4: CN2.35 P1.4
PB5: CN2.37
PB6: CN2.25
PB7: CN1.29
PB8: CN2.11 U1.2
PB9: CN2.13
PB10: CN2.33
PB11: CN2.26
PB12: CN2.24
PB13: CN2.38
PB14: CN2.36
PB15: CN2.34
PC1: CN1.44
PC2: CN1.43
PC3: CN1.45
PC4: CN2.42
PC5: CN2.14
PC6: CN2.12
PC7: CN2.27
PC9: CN2.9
PC10: CN1.9 P1.6
PC11: CN1.10
PC12: CN1.11 U1.14
PC13: CN1.31
PC14: CN1.33
PC15: CN1.35
PD0: C4.2 CN1.67 R7.1 U1.13
PD1: CN1.65 R7.2
PD2: CN1.12 U1.15
PD3: CN1.50 U1.16
PD5: CN1.51 U1.1
PD6: CN1.53
PD7: CN1.55
PD8: CN2.18
PD9: CN1.79
PD10: CN2.75
PD11: CN2.55
PD12: CN2.53 U2.2
PD13: CN2.51
PD14: CN2.56
PE0: CN2.74
PE1: CN1.71
PE2: CN1.56
PE3: CN1.57
PE4: CN1.58
PE5: CN1.60
PE7: C7.2 CN2.54 R8.1 U2.13
PE8: CN2.50
PE10: CN2.57 R8.2
PE11: CN2.66
PE12: CN2.59
PE13: CN2.65
PE14: CN2.61
PE15: CN2.63
PF0: CN1.63
PF1: CN1.61
PF2: CN1.62
PF3: CN2.68
PF4: CN2.46
PF5: CN2.44
PF6: CN1.17
PF8: CN1.64
PF10: CN2.52
PF11: CN2.72
PF12: CN2.69
PF14: CN2.60
PF15: CN2.70 P1.8
PG0: CN1.69 U2.1
PG1: CN1.68 U2.14
PG6: CN2.80
PG7: CN2.77
PG8: CN2.76
PG9: CN1.73
PG10: CN1.76
PG11: CN1.80
PG12: CN1.75
PG13: CN1.78
PG14: CN2.71
PG15: CN1.74
PH0: CN1.37
PH1: CN1.39
SHAFT_OUT1+: P2.1 P2.2 U1.3
SHAFT_OUT1-: P2.3 P2.4 U1.5
SHAFT_OUT2+: P2.5 P2.6 U1.10
SHAFT_OUT2-: P2.7 P2.8 U1.8
VBAT: CN1.41
VIN: CN1.32
ZSupply: CN1.2 CN1.4 | length 2.5
  Signal Layer 1 w0.5: CN1.4 CN1.2
pads on no net: CN1.14 CN1.18 CN1.19 CN1.26 CN1.34 CN1.40 CN1.46 CN1.47 CN1.48 CN1.49 CN1.52 CN1.54 CN1.66 CN1.72 CN1.77 CN2.10 CN2.15 CN2.19 CN2.21 CN2.32 CN2.45 CN2.47 CN2.48 CN2.58 CN2.62 CN2.67 CN2.78 CN2.79

## Polygon pours and split planes (outlines as drawn)
GND on Top Layer "NONET_L01_P114" (solid, remove dead copper, shelved, pour order 114): 1.574,133.34 0.112,131.879 0.112,107.629 0.112,1.629 1.612,0.129 37.549,0.129 37.537,0.12 68.233,0 69.862,1.629 69.862,106.879 67.862,106.879 69.862,106.879 69.862,131.879 68.401,133.34
GND on Signal Layer 1 "NONET_L02_P020" (solid, remove dead copper, shelved, pour order 20): 35.266,0 53.666,0 69.037,0 69.416,0.379 70,0.963 70,132.345 69.005,133.34 68,133.34 -0.034,133.379 -0.034,0.929 0.895,0
GND on Bottom Layer "NONET_L06_P050" (solid, remove dead copper, shelved, pour order 50): 35.369,0.079 53.541,0.079 53.541,0.054 53.591,0.079 68.541,0.079 69.866,1.404 69.866,131.829 68.466,133.229 1.791,133.254 1.516,133.254 0.041,131.779 0.041,1.629 1.591,0.079

## Other copper
Top Layer:
  text "1" at 68.13,117.165 h1 r90
Signal Layer 1:
  text "2" at 68.13,118.415 h1 r90
Signal Layer 2:
  text "3" at 68.13,119.915 h1 r90
Signal Layer 3:
  text "4" at 68.13,122.165 h1 r90
Signal Layer 4:
  text "5" at 68.13,123.665 h1 r90
Bottom Layer:
  text "6" at 68.13,125.165 h1 r90
Multi-Layer:
  pour cut-out: 66.512,116.931 68.512,116.931 68.512,125.431 66.512,125.431

## Silkscreen, mask and mechanical layers (free items; w line width, h text height)
Top Overlay:
  circle w0.1: c33.532,58.705 r4.663
  circle w0.254: c33.532,58.705 r5
  lines w0.127: 32.008,61.067 32.77,60.305 33.532,60.813 32.516,59.543 34.04,60.305 33.024,59.035 34.548,59.797 33.532,58.527 35.056,59.289 34.04,58.019 35.564,58.781 35.056,58.019 35.818,57.257
  lines w0.254: 31.5,61.194 32.516,61.194 ; 32.008,61.067 32.008,57.257 35.818,57.257 ; 35.945,56.749 35.945,57.765
  text "ZSupply" at 6.538,107.48 h1
  text "+3.3" at 59.969,107.29 h1
  text "+12" at 67.615,106.883 h1 r45
  text "+3.3" at 0.752,106.525 h1 r45
  text "+3.3" at 59.842,105.08 h1
  text "ZSupply" at 6.538,104.94 h1
  text "+12" at 67.742,104.394 h1 r45
  text "+3.3" at 0.752,103.731 h1 r45
  text "+5" at 60.188,102.512 h1
  text "+5R" at 6.848,102.207 h1
  text "-5" at 68.123,102.006 h1 r45
  text "+5" at 1.26,101.953 h1 r45
  text "+5" at 60.188,99.718 h1
  text "+5R" at 6.848,99.667 h1
  text "-5" at 67.818,99.466 h1 r45
  text "+5" at 1.26,99.413 h1 r45
  text "Heaters/ Levels" at 28.118,69.774 h1
  text "ZLS Corp" at 27.94,67.818 h1
  text "REV A" at 27.94,65.913 h1
  text "ZLS" at 32.516,55.657 h1
Bottom Overlay:
  text "CN12" at 67.183,109.982 h1.5
  text "PC6" at 69.85,99.06 h1 r45
  text "PC10" at 1.905,97.155 h1 r315
  text "PC11" at 9.525,97.155 h1
  text "PC9" at 62.89,97.028 h1
  text "PC5" at 69.85,96.52 h1 r45
  text "PC12" at 1.905,94.615 h1 r315
  text "PD2" at 9.525,94.615 h1
  text "PB8" at 62.865,94.615 h1
  text "PC8" at 76.2,93.98 h1 r45
  text "U5V" at 69.85,93.345 h1 r45
  text "3V3" at 1.905,92.075 h1 r315
  text "VDD" at 9.525,92.075 h1
  text "PB9" at 62.865,92.075 h1
  text "BT0" at 1.905,89.535 h1 r315
  text "GND" at 9.525,89.535 h1
  text "VREF+" at 62.23,89.535 h1
  text "PD8" at 69.85,88.9 h1 r45
  text "PF6" at 1.905,86.995 h1 r315
  text "NC" at 8.89,86.995 h1
  text "5V_USB_STLK" at 53.34,86.995 h1
  text "GND" at 62.23,86.995 h1
  text "PA12" at 70.485,86.995 h1 r45
  text "PF7" at 1.905,84.455 h1 r315
  text "+3V3" at 11.43,84.455 h1
  text "PA5" at 62.23,84.455 h1
  text "PA11" at 69.85,83.82 h1 r45
  text "E5V" at -3.175,82.55 h1
  text "NRST" at 10.795,81.915 h1
  text "PA6" at 62.23,81.915 h1
  text "PA13" at 2.103,81.507 h1 r315
  text "PB12" at 69.85,81.28 h1 r45
  text "PA7" at 61.895,79.602 h1
  text "3V3" at 9.469,79.348 h1
  text "PA14" at 2.103,78.942 h1 r315
  text "PB11" at 69.85,78.74 h1 r45
  text "PB6" at 61.895,77.062 h1
  text "+5V" at 9.469,76.758 h1
  text "PA15" at 2.103,76.453 h1 r315
  text "GND" at 69.85,76.2 h1 r45
  text "GND" at 1.697,74.649 h1 r315
  text "PC7" at 61.895,74.522 h1
  text "GND" at 9.469,74.294 h1
  text "PB2" at 69.845,73.862 h1 r45
  text "PB7" at 1.697,72.109 h1 r315
  text "PA9" at 61.895,71.982 h1
  text "GND" at 9.469,71.754 h1
  text "PB1" at 69.692,71.144 h1 r45
  text "PA8" at 61.895,69.442 h1
  text "PC13" at 1.905,69.215 h1 r315
  text "VIN" at 9.525,69.215 h1
  text "PB15" at 69.794,68.452 h1 r45
  text "PB10" at 61.895,66.902 h1
  text "PC14" at 1.905,66.675 h1 r315
  text "NC" at 8.89,66.675 h1
  text "PB14" at 69.845,65.836 h1 r45
  text "PB4" at 61.895,64.362 h1
  text "PA0" at 9.469,64.159 h1
  text "PC15" at 1.905,64.135 h1 r315
  text "PB13" at 70.485,63.5 h1 r45
  text "PB5" at 61.895,61.822 h1
  text "OSCI" at 1.905,61.595 h1 r315
  text "PA1" at 9.164,61.568 h1
  text "AGND" at 70.485,60.325 h1 r45
  text "PB3" at 61.895,59.282 h1
  text "PA4" at 9.469,59.13 h1
  text "OSCO" at 1.905,59.055 h1 r315
  text "PC4" at 69.85,57.15 h1 r45
  text "VBAT" at 2.103,56.768 h1 r315
  text "PA10" at 61.895,56.742 h1
  text "PB0" at 9.469,56.488 h1
  text "PC2" at 1.697,54.685 h1 r315
  text "PA2" at 61.895,54.202 h1
  text "PC1" at 9.525,53.975 h1
  text "NC" at 69.215,53.975 h1
  text "PC3" at 1.697,52.094 h1 r315
  text "PA3" at 61.895,51.662 h1
  text "PC0" at 9.525,51.435 h1
  text "NC" at 69.215,51.435 h1
  text "PE8" at 69.85,50.165 h1 r45
  text "PF10" at 70.485,48.26 h1 r45
  text "GND" at 61.895,47.217 h1
  text "PD4" at 1.905,46.99 h1 r315
  text "PD3" at 9.469,46.278 h1
  text "PE7" at 69.85,45.085 h1 r45
  text "PD13" at 61.895,44.677 h1
  text "PD5" at 1.595,44.169 h1 r315
  text "NC" at 8.872,43.902 h1
  text "PD14" at 69.85,43.18 h1 r45
  text "PD12" at 61.895,42.137 h1
  text "PD6" at 1.595,41.655 h1 r315
  text "NC" at 8.897,41.427 h1
  text "PD15" at 69.85,40.64 h1 r45
  text "PD11" at 61.895,39.597 h1
  text "PD7" at 1.544,39.191 h1 r315
  text "PE2" at 9.469,38.683 h1
  text "PF14" at 70.485,38.1 h1 r45
  text "PE10" at 61.895,37.057 h1
  text "PE3" at 1.57,36.6 h1 r315
  text "PE4" at 9.469,36.27 h1
  text "PE12" at 61.895,34.517 h1
  text "GND" at 1.62,34.162 h1 r315
  text "PE5" at 9.469,33.451 h1
  text "PE9" at 69.87,33.095 h1 r45
  text "PE14" at 61.895,31.977 h1
  text "NC" at 1.991,31.785 h1
  text "NC" at 8.947,31.202 h1
  text "GND" at 69.87,30.58 h1 r45
  text "PE15" at 61.895,29.437 h1
  text "NC" at 2.041,29.235 h1
  text "PF8" at 9.469,28.523 h1
  text "PE11" at 69.997,28.117 h1 r45
  text "PE13" at 61.895,26.897 h1
  text "PD1" at 1.697,26.44 h1 r315
  text "PF9" at 9.469,25.983 h1
  text "NC" at 61.874,23.958 h1
  text "PD0" at 1.697,23.849 h1 r315
  text "NC" at 8.972,23.652 h1
  text "NC" at 69.215,23.495 h1
  text "PF15" at 70.485,23.495 h1 r45
  text "NC" at 1.941,21.61 h1
  text "NC" at 61.924,21.383 h1
  text "GND" at 9.572,21.027 h1
  text "PF11" at 69.845,20.243 h1 r45
  text "PE1" at 1.62,18.744 h1 r315
  text "PG14" at 61.895,18.642 h1
  text "PE6" at 9.469,18.338 h1
  text "PE0" at 69.87,18.007 h1 r45
  text "PG9" at 1.646,16.153 h1 r315
  text "GND" at 61.895,16.102 h1
  text "PG15" at 10.106,15.998 h1
  text "PG8" at 69.819,15.366 h1 r45
  text "PD10" at 61.895,13.562 h1
  text "PG10" at 10.21,13.41 h1
  text "PG12" at 2.103,12.927 h1 r315
  text "PG5" at 69.819,12.641 h1 r45
  text "NC" at 2.041,11.41 h1
  text "PG7" at 61.908,11.304 h1
  text "PG13" at 10.21,10.845 h1
  text "PG6" at 69.946,10.514 h1 r45
  text "PG4" at 61.774,8.658 h1
  text "PD9" at 1.697,8.533 h1 r315
  text "PG11" at 10.21,8.432 h1
Top Solder:
  region: 68.512,116.931 68.512,125.431 66.512,125.431 66.512,116.931
Bottom Solder:
  region: 68.512,116.931 68.512,125.431 66.512,125.431 66.512,116.931

## Dimensions
2,0 to 3.81,133.35 on M2-Board Dimensions
0,131.34 to 70,131.34 on M2-Board Dimensions

## Text inside footprints (layer, text, board x,y; h text height)
P1: Top Overlay "8" at 50.61,67.472 h1.97 r270; Top Overlay "7" at 47.18,67.472 h1.97 r270; Top Overlay "2" at 50.61,78.338 h1.97 r270; Top Overlay "1" at 47.18,78.338 h1.97 r270; Mechanical 40 "3.810" at 55.118,73.05 h0.39 r270; Mechanical 40 "8.255" at 42.482,73.05 h0.39 r270; Mechanical 40 "1.270" at 54.102,76.924 h0.39 r270; Mechanical 40 "5.715" at 49.403,83.401 h0.39 r270; Mechanical 40 "3.429" at 49.403,81.559 h0.39 r270; M16-Top Courtyard "8" at 50.61,67.472 h1.97 r270; M16-Top Courtyard "7" at 47.18,67.472 h1.97 r270; M16-Top Courtyard "2" at 50.61,78.338 h1.97 r270; M16-Top Courtyard "1" at 47.18,78.338 h1.97 r270
P2: Top Overlay "8" at 26.832,53.53 h1.97 r180; Top Overlay "7" at 26.832,56.96 h1.97 r180; Top Overlay "2" at 37.698,53.53 h1.97 r180; Top Overlay "1" at 37.698,56.96 h1.97 r180; Mechanical 40 "3.810" at 32.41,49.022 h0.39 r180; Mechanical 40 "8.255" at 32.41,61.658 h0.39 r180; Mechanical 40 "1.270" at 36.284,50.038 h0.39 r180; Mechanical 40 "5.715" at 42.761,54.737 h0.39 r180; Mechanical 40 "3.429" at 40.919,54.737 h0.39 r180; M16-Top Courtyard "8" at 26.832,53.53 h1.97 r180; M16-Top Courtyard "7" at 26.832,56.96 h1.97 r180; M16-Top Courtyard "2" at 37.698,53.53 h1.97 r180; M16-Top Courtyard "1" at 37.698,56.96 h1.97 r180
P3: Top Overlay "8" at 25.21,68.742 h1.97 r270; Top Overlay "7" at 21.78,68.742 h1.97 r270; Top Overlay "2" at 25.21,79.608 h1.97 r270; Top Overlay "1" at 21.78,79.608 h1.97 r270; Mechanical 40 "3.810" at 29.718,74.32 h0.39 r270; Mechanical 40 "8.255" at 17.082,74.32 h0.39 r270; Mechanical 40 "1.270" at 28.702,78.194 h0.39 r270; Mechanical 40 "5.715" at 24.003,84.671 h0.39 r270; Mechanical 40 "3.429" at 24.003,82.829 h0.39 r270; M16-Top Courtyard "8" at 25.21,68.742 h1.97 r270; M16-Top Courtyard "7" at 21.78,68.742 h1.97 r270; M16-Top Courtyard "2" at 25.21,79.608 h1.97 r270; M16-Top Courtyard "1" at 21.78,79.608 h1.97 r270